# EAGLE board NrfPS2-1.0 (EAGLE 6.4)
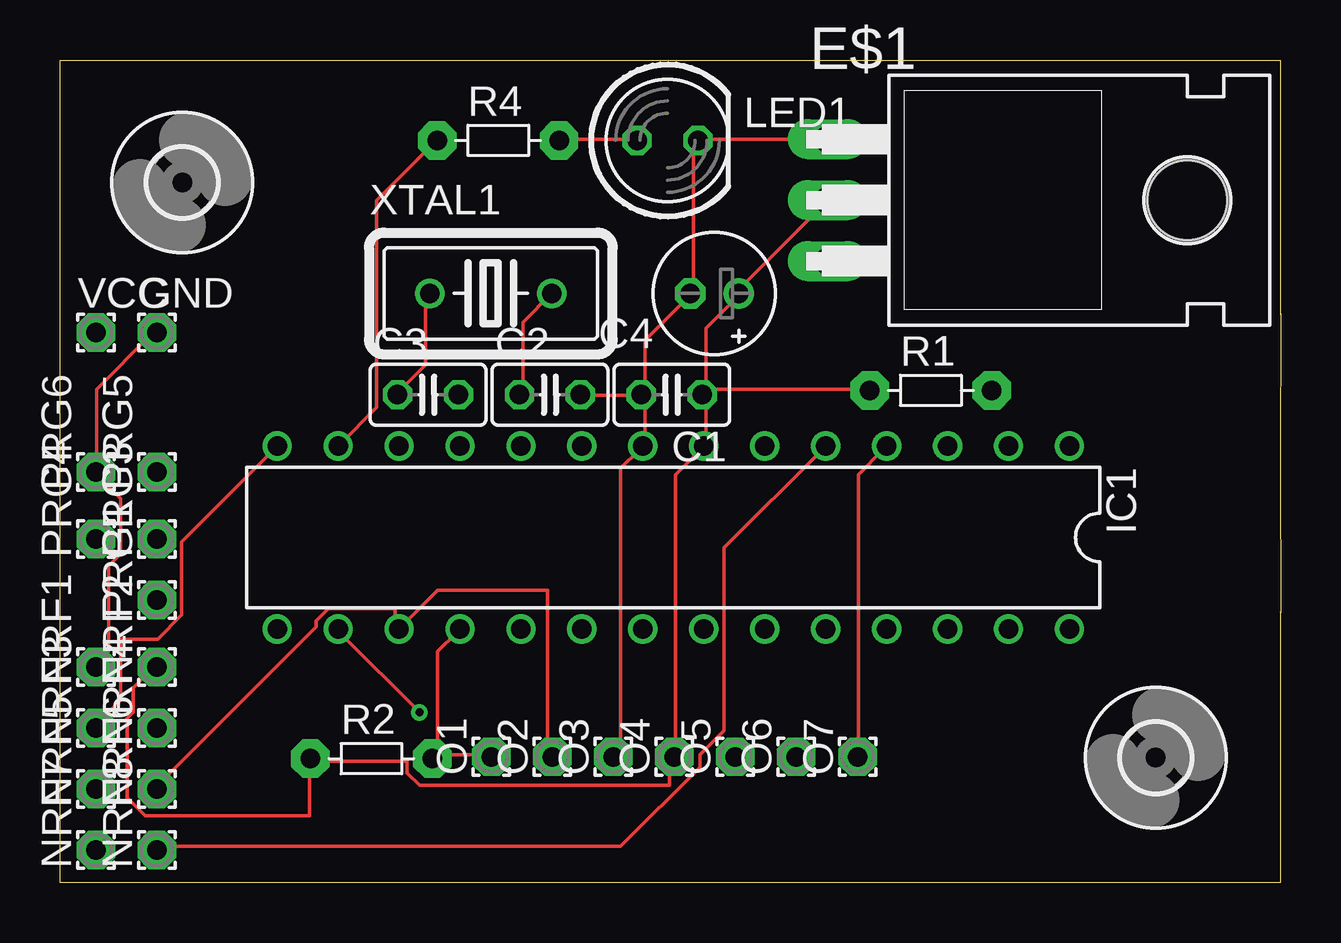
[diagram p0: board, top side]
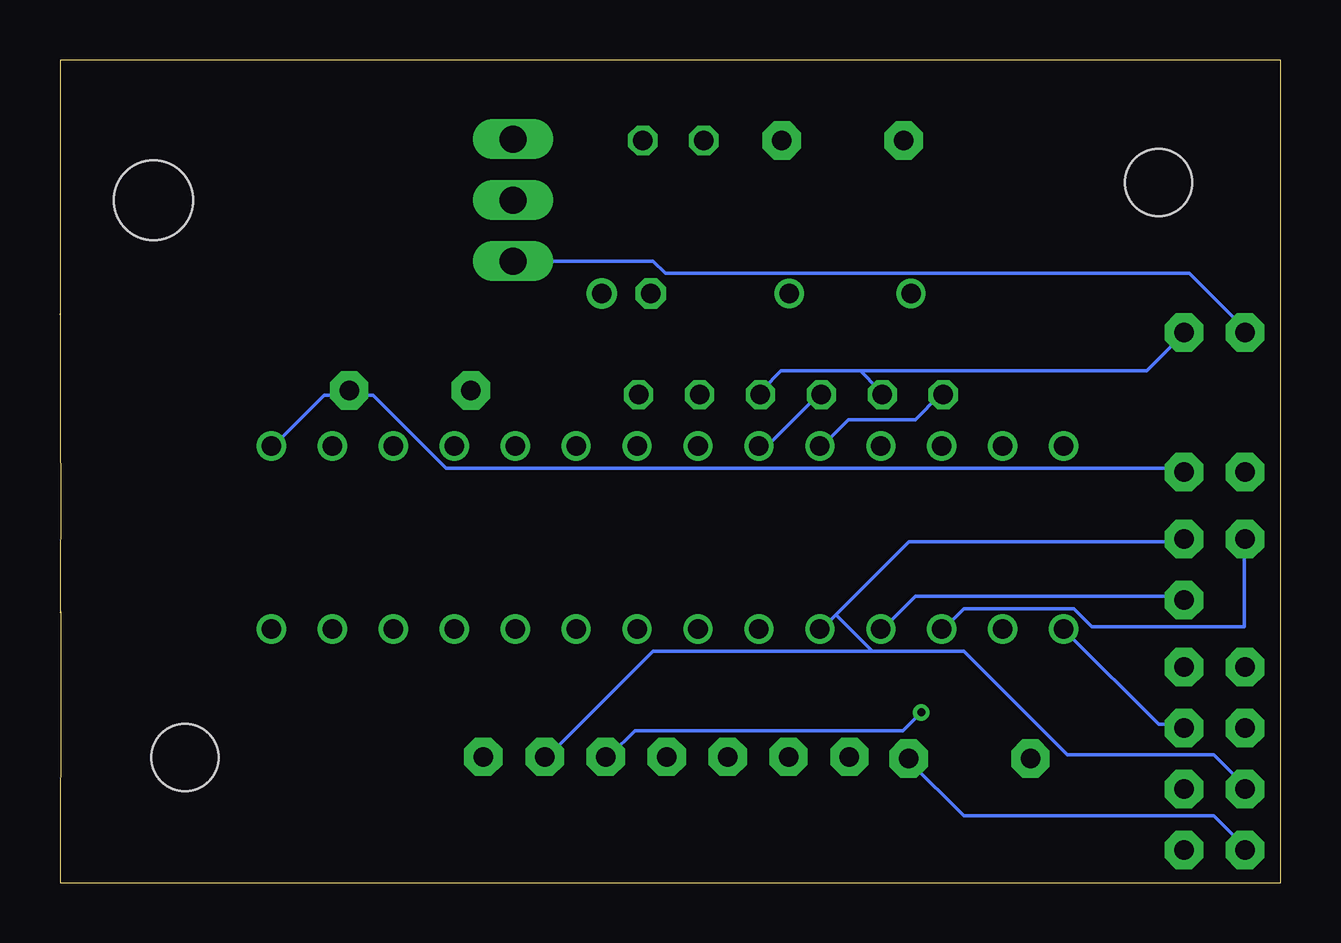
[diagram p1: board, bottom side, seen from below]

Size 50.89 x 34.29 mm. Coordinates in mm from the lower left corner, seen from the top.
Outline: 0,0 0,14.34 0.01,14.36 0.01,22.51 0,23.6 0,34.29 50.87,34.29 50.87,23.67 50.88,23.72 50.89,20.7 50.87,20.66 50.86,14.34 50.88,14.29 50.88,11.25 50.86,11.3 50.86,8.78 50.87,0 0,0
Copper layers (1*16): Top 0.0356mm / dielectric 1.5011mm / Bottom 0.0356mm
Design rules "LaenPCBOrder": minimum track width 6mil, minimum drill 13mil, track to track 6mil, track to pad 6mil, pad to pad 6mil, via to via 6mil, smd to smd 6mil, copper to edge 15mil, drill to drill 6mil, minimum pad ring 7mil, minimum via ring 7mil, stop-mask expansion 4mil, vias tented up to drill 0mil, thermal gap 10mil

## Footprints (pad centres in the part's own frame; a part is rotated, then mirrored left to right if it is on the bottom)
C025-025X050 = drill 0.813 octagon: 1 -1.27,0; 2 1.27,0
E2-5 = drill 0.813 pad 1.27: + -1.016,0 | drill 0.813 pad 1.27 octagon: - 1.016,0
TO220H = drill 1.118 long: 1 -2.54,-10.16; 2 0,-10.16; 3 2.54,-10.16 | hole 3.302: 0,4.826
2,8 = hole 2.8: 0,0
1,6/0,8 = drill 0.813 pad 1.6 octagon: 1 0,0
PDIP-T28 = drill 0.813 pad 1.2: 1 -16.51,-3.81; 2 -13.97,-3.81; 3 -11.43,-3.81; 4 -8.89,-3.81; 5 -6.35,-3.81; 6 -3.81,-3.81; 7 -1.27,-3.81; 8 1.27,-3.81; 9 3.81,-3.81; 10 6.35,-3.81; 11 8.89,-3.81; 12 11.43,-3.81; 13 13.97,-3.81; 14 16.51,-3.81; 15 16.51,3.81; 16 13.97,3.81; 17 11.43,3.81; 18 8.89,3.81; 19 6.35,3.81; 20 3.81,3.81; 21 1.27,3.81; 22 -1.27,3.81; 23 -3.81,3.81; 24 -6.35,3.81; 25 -8.89,3.81; 26 -11.43,3.81; 27 -13.97,3.81; 28 -16.51,3.81
LED5MM = drill 0.813 octagon: A -1.27,0; K 1.27,0
R-5 = drill 0.813 pad 1.6 octagon: 1 -2.54,0; 2 2.54,0
HC18U-V = drill 0.813: 1 -2.54,0; 2 2.54,0

## Placement (x,y rotation side)
C1  [C025-025X050]  25.5,20.35 180 top
C2  [C025-025X050]  20.42,20.35 0 top
C3  [C025-025X050]  15.34,20.35 0 top
C4  [E2-5]  27.28,24.56 180 top
E$1  [TO220H]  42.16,28.45 270 top
E$2  [2,8]  5.1,29.18 0 top
E$14  [2,8]  45.68,5.22 0 top
GND  [1,6/0,8]  4.04,22.94 0 top
IC1  [PDIP-T28]  25.57,14.4 180 top
LED1  [LED5MM]  25.32,30.94 0 top
NRF1  [1,6/0,8]  1.5,8.99 90 top
NRF2  [1,6/0,8]  4.04,8.99 90 top
NRF3  [1,6/0,8]  1.5,6.45 90 top
NRF4  [1,6/0,8]  4.04,6.45 90 top
NRF5  [1,6/0,8]  1.5,3.91 90 top
NRF6  [1,6/0,8]  4.04,3.91 90 top
NRF7  [1,6/0,8]  1.5,1.37 90 top
NRF8  [1,6/0,8]  4.04,1.37 90 top
O1  [1,6/0,8]  17.98,5.26 90 top
O2  [1,6/0,8]  20.52,5.26 90 top
O3  [1,6/0,8]  23.06,5.26 90 top
O4  [1,6/0,8]  25.6,5.26 90 top
O5  [1,6/0,8]  28.14,5.26 90 top
O6  [1,6/0,8]  30.68,5.26 90 top
O7  [1,6/0,8]  33.25,5.26 90 top
PRG1  [1,6/0,8]  4.04,11.79 90 top
PRG3  [1,6/0,8]  4.04,14.33 90 top
PRG4  [1,6/0,8]  1.5,14.33 90 top
PRG5  [1,6/0,8]  4.04,17.12 90 top
PRG6  [1,6/0,8]  1.5,17.12 90 top
R1  [R-5]  36.3,20.52 0 top
R2  [R-5]  12.98,5.18 0 top
R4  [R-5]  18.26,30.94 0 top
VCC  [1,6/0,8]  1.5,22.94 0 top
XTAL1  [HC18U-V]  17.96,24.56 0 top

## Library data of the parts
C1-C3 = resistor
C4 = rcl
E$1 = linear
E$2 E$14 = holes
GND NRF1-NRF8 O1-O7 PRG1 PRG3-PRG6 VCC = wirepad
IC1 = texas
LED1 = led
R1 R2 R4 = discrete
XTAL1 = crystal

## Nets
S$2: C1.2 C2.2 C3.2 C4.- E$1.1 GND.1 IC1.8 LED1.K NRF1.1 O3.1 PRG6.1
S$3: E$1.3 VCC.1
S$4: IC1.26
S$5: IC1.13 R4.1
S$6: C2.1 IC1.9 XTAL1.2
S$7: C3.1 IC1.10 XTAL1.1
S$8: IC1.1 PRG5.1 R1.2
S$9: IC1.18 NRF7.1 O1.1 PRG1.1 R2.2
S$10: C1.1 C4.+ E$1.2 IC1.7 NRF2.1 O4.1 R1.1 R2.1
S$11: IC1.15 NRF4.1
S$12: IC1.19 NRF5.1 O6.1 PRG3.1
S$13: IC1.17 NRF6.1 O2.1 PRG4.1
S$14: IC1.14 NRF3.1
S$15: IC1.16 O5.1
S$16: IC1.4 O7.1
S$17: IC1.28
S$18: IC1.5 NRF8.1
S$19: IC1.27
S$22: LED1.A R4.2

## Tracks (layer width: path | path; a pad name or v marks a point on that pad's centre or on a via)
S$2
  Top 0.152: NRF1.1 1.52,9.14 2.03,9.65 2.03,13.21 2.54,13.72 2.54,16 1.52,17.02 PRG6.1 1.52,17.27 1.52,20.57 3.81,22.86 GND.1 | E$1.1 26.67,30.99 LED1.K 26.42,30.73 26.42,24.64 C4.- 26.16,24.38 24.38,22.61 24.38,20.57 C1.2 | C1.2 24.38,20.32 24.38,18.29 IC1.8 24.13,18.03 23.37,17.27 23.37,5.59 23.11,5.33 O3.1 | C2.2 21.84,20.32 24.13,20.32 C1.2
  Bottom 0.152: 17.53,21.34 16.76,20.57 C3.2 | 17.53,21.34 20.83,21.34 21.59,20.57 C2.2 | 17.53,21.34 5.59,21.34 4.06,22.86 GND.1
S$3
  Bottom 0.152: E$1.3 26.16,25.91 25.65,25.4 3.81,25.4 1.52,23.11 VCC.1
S$5
  Top 0.152: IC1.13 11.68,18.29 13.21,19.81 13.21,28.45 15.49,30.73 R4.1
S$6
  Top 0.152: XTAL1.2 19.3,23.37 19.3,20.57 C2.1
  Bottom 0.152: C2.1 19.3,20.32 21.34,18.29 21.59,18.29 IC1.9
S$7
  Top 0.152: C3.1 14.22,20.57 15.24,21.59 15.24,24.38 XTAL1.1
  Bottom 0.152: IC1.10 19.05,18.29 18.03,19.3 15.24,19.3 14.22,20.32 C3.1
S$8
  Bottom 0.152: IC1.1 41.91,18.29 39.88,20.32 38.86,20.32 R1.2 38.61,20.32 37.85,20.32 34.8,17.27 4.06,17.27 PRG5.1
S$9
  Top 0.152: 15.75,5.33 15.75,9.65 16.51,10.41 IC1.18 | 15.75,5.33 17.78,5.33 O1.1 | 15.75,5.33 R2.2
  Bottom 0.152: NRF7.1 1.52,1.52 2.79,2.79 13.21,2.79 15.49,5.08 R2.2 | PRG1.1 4.06,11.94 15.24,11.94 16.51,10.67 IC1.18
S$10
  Top 0.152: 26.92,20.57 26.92,23.11 28.19,24.38 C4.+ 28.45,24.64 28.45,24.89 E$1.2 | 26.92,20.57 33.53,20.57 R1.1 | 26.92,20.57 C1.1 26.92,20.32 26.92,18.29 IC1.7 26.67,18.03 25.65,17.02 25.65,5.33 O4.1 25.4,5.08 25.4,4.06 14.99,4.06 14.48,4.57 14.48,5.08 10.67,5.08 R2.1 10.41,5.08 10.41,2.79 3.56,2.79 2.79,3.56 2.79,6.86 3.05,7.11 3.05,8.13 3.81,8.89 NRF2.1
S$11
  Bottom 0.152: IC1.15 8.89,10.41 5.08,6.6 4.06,6.6 NRF4.1
S$12
  Bottom 0.152: 18.54,11.18 15.49,14.22 4.06,14.22 PRG3.1 | 18.54,11.18 19.05,10.67 IC1.19 | 17.02,9.65 13.21,9.65 8.89,5.33 2.79,5.33 1.52,4.06 NRF5.1 | 18.54,11.18 17.02,9.65 | 17.02,9.65 26.16,9.65 30.48,5.33 O6.1
S$13
  Top 0.152: O2.1 20.32,5.33 20.32,12.19 15.75,12.19 14.22,10.67 IC1.17 13.97,10.67 13.97,11.43 11.18,11.43 10.67,10.92 10.67,10.67 4.06,4.06 NRF6.1
  Bottom 0.152: PRG4.1 1.52,14.22 1.52,10.67 7.87,10.67 8.64,11.43 13.21,11.43 13.97,10.67 IC1.17
S$14
  Top 0.152: IC1.14 8.89,18.03 5.08,14.22 5.08,11.18 4.06,10.16 2.54,10.16 2.54,7.62 1.52,6.6 NRF3.1
S$15  (via drill 0.33)
  Top 0.152: v14.99,7.11 11.68,10.41 IC1.16
  Bottom 0.152: v14.99,7.11 15.75,6.35 26.92,6.35 27.94,5.33 O5.1
S$16
  Top 0.152: IC1.4 34.29,18.03 33.27,17.02 33.27,5.33 O7.1
S$18
  Top 0.152: IC1.5 31.75,18.03 27.69,13.97 27.69,6.35 26.67,5.33 26.67,4.83 23.37,1.52 4.06,1.52 NRF8.1
S$22
  Top 0.152: LED1.A 23.88,30.99 20.83,30.99 R4.2

## Text on the board
tNames: 330 | 16MHz | 3V3 | 100uF | VCC | GND | 22pF | 22pF | 0.1uF | 4.7K | ATmega328 | ICSP | DualShock | 4.7K | NRF24L01+ | 5 3V3 | 6 SS | 7 SCK | 9 ACK | 1 MISO | 2 MOSI | 4 GND